# EAGLE board conduct-555-REVA (EAGLE 6.5.0)
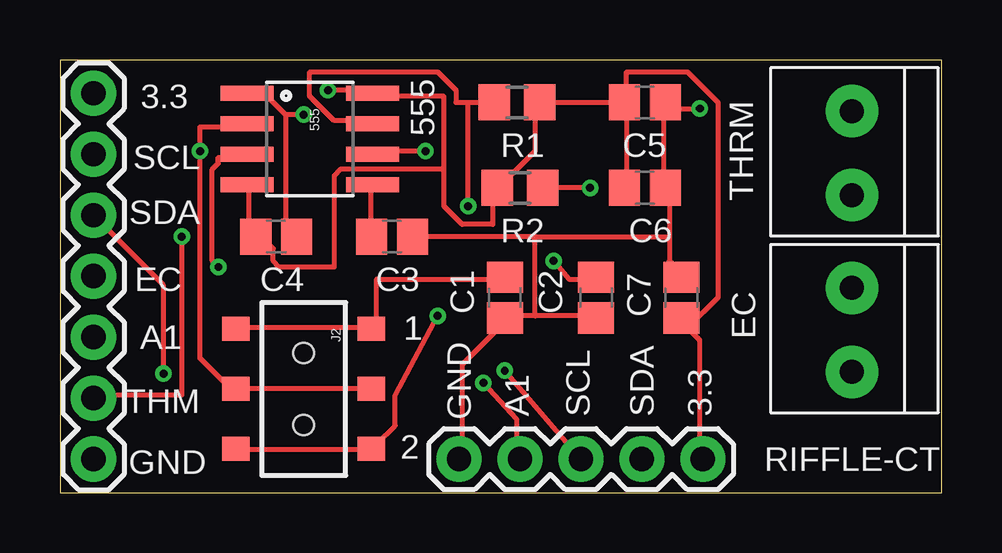
[diagram p0: board, top side]
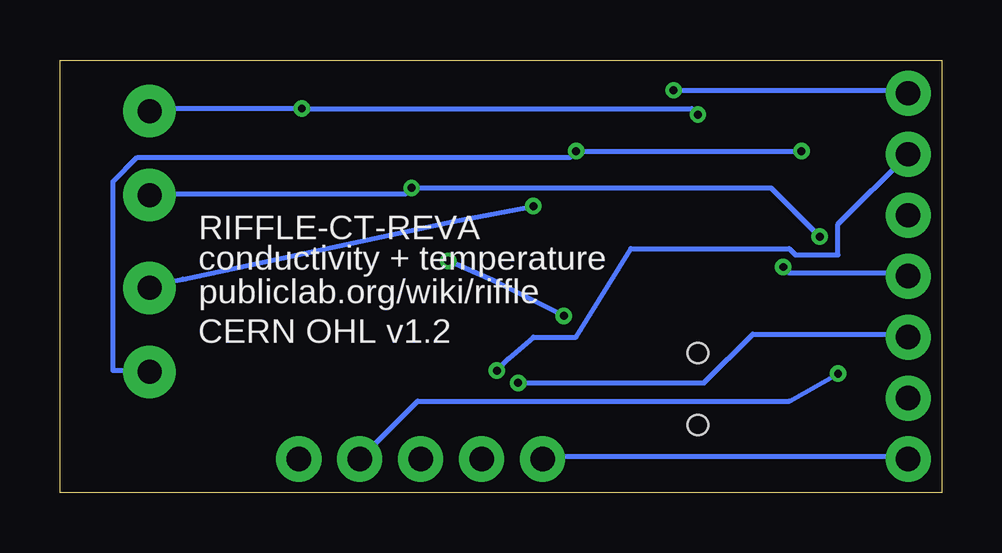
[diagram p1: board, bottom side, seen from below]

Size 36.75 x 18.02 mm. Coordinates in mm from the lower left corner, seen from the top.
Outline: 0,0 36.75,0 36.75,18.02 0,18.02 0,0
Copper layers (1*16): Top 0.0356mm / dielectric 1.5011mm / Bottom 0.0356mm
Design rules "LaenPCBOrder": minimum track width 6mil, minimum drill 13mil, track to track 6mil, track to pad 6mil, pad to pad 6mil, via to via 6mil, smd to smd 6mil, copper to edge 15mil, drill to drill 6mil, minimum pad ring 7mil, minimum via ring 7mil, stop-mask expansion 3mil, vias tented up to drill 0mil, thermal gap 10mil
Net classes: 0 default: width 0.203 mm, drill 0.33 mm, clearance 0.203 mm

## Footprints (pad centres in the part's own frame; a part is rotated, then mirrored left to right if it is on the bottom)
SO08@1 = smd 0.61 x 2.21: 1 -1.905,-2.616; 2 -0.635,-2.616; 3 0.635,-2.616; 4 1.905,-2.616; 5 1.905,2.616; 6 0.635,2.616; 7 -0.635,2.616; 8 -1.905,2.616
C0805 = smd 1.3 x 1.5: 1 -0.85,0; 2 0.85,0
1X2-3.5MM = drill 1 pad 2.184: 1 1.8,0; 2 -1.7,0
AYZ0202 = smd 1 x 1.15: 1 -2.5,2.825; 2 0,2.825; 3 2.5,2.825; 4 -2.5,-2.825; 5 0,-2.825; 6 2.5,-2.825 | hole 0.85: 1.5,0; -1.5,0
1X05 = drill 1.016 pad 1.88: 1 0,0; 2 2.54,0; 3 5.08,0; 4 7.62,0; 5 10.16,0
1X07 = drill 1.016 pad 1.88: 1 0,0; 2 2.54,0; 3 5.08,0; 4 7.62,0; 5 10.16,0; 6 12.7,0; 7 15.24,0
R0805 = smd 1.3 x 1.5: 1 -0.95,0; 2 0.95,0

## Placement (x,y rotation side)
555  NE555D  [SO08@1]  10.41,14.73 270 top
C1  1uF  [C0805]  18.54,8.13 270 top
C2  .1uF  [C0805]  22.35,8.13 270 top
C3  .01u  [C0805]  13.84,10.67 180 top
C4  100n  [C0805]  9.02,10.67 180 top
C5  100n  [C0805]  24.38,16.26 180 top
C6  .1uF  [C0805]  24.38,12.7 180 top
C7  1uF  [C0805]  25.91,8.13 270 top
EC  1X2-3.5MM  [1X2-3.5MM]  33.02,6.73 90 top
J2  AYZ0202  [AYZ0202]  10.16,4.32 270 top
JP2  [1X05]  16.64,1.4 0 top
JP4  [1X07]  1.4,1.4 90 top
R1  3.3K  [R0805]  19.05,16.26 180 top
R2  10k  [R0805]  19.18,12.7 180 top
THRM  1X2-3.5MM  [1X2-3.5MM]  33.02,14.1 90 top

## Library data of the parts
555 = SparkFun-AnalogIC
C1-C7 = resistor
EC THRM = adafruit
J2 = SparkFunNew
JP2 JP4 = SparkFun-Connectors
R1 R2 = rcl

## Nets
A1: JP2.2 JP4.3
EC: 555.3 JP4.4
GND: 555.1 C1.2 C2.2 C3.1 C4.1 C5.1 C6.1 C7.1 JP2.1 JP4.1 THRM.1
N1: 555.2 555.6 EC.2 J2.2 J2.5
N$2: 555.5 C3.2
N$3: 555.7 EC.1 R1.2
N$6: C2.1 J2.3 J2.6
SCL: JP2.3 JP4.6
SDA: JP2.4 JP4.5
THRM: JP4.2 R2.1 THRM.2
VCC: 555.4 555.8 C4.2 C5.2 C6.2 C7.2 JP2.5 JP4.7 R1.1 R2.2
VDD2: C1.1 J2.1 J2.4

## Tracks (layer width: path | path; a pad name or v marks a point on that pad's centre or on a via)
A1  (via drill 0.33)
  Top 0.203: v17.65,4.57 19.05,3.05 19.05,1.52 JP2.2
  Bottom 0.203: v17.65,4.57 9.91,4.57 7.87,6.6 1.52,6.6 JP4.3
EC  (via drill 0.33)
  Top 0.203: v6.6,9.4 6.35,9.65 6.35,13.46 6.6,13.72 6.6,13.97 7.62,13.97 555.3
  Bottom 0.203: v6.6,9.4 6.35,9.14 1.52,9.14 JP4.4
GND  (via drill 0.33)
  Top 0.203: 9.4,15.75 9.4,10.92 9.65,10.67 C4.1 | 9.4,15.75 8.64,16.51 7.87,16.51 555.1 7.87,16.76 | 25.15,16 25.15,16.26 C5.1 25.15,16 | 25.15,16 25.15,12.7 C6.1 25.4,12.7 25.4,10.67 | 25.4,10.67 25.4,9.65 25.91,9.14 C7.1 | 19.81,7.37 22.35,7.37 C2.2 | 19.81,7.37 18.54,7.37 C1.2 18.54,7.11 16.76,5.33 16.76,1.52 JP2.1 | 19.81,10.67 C3.1 | 19.81,7.37 19.81,10.67 | 19.81,10.67 25.4,10.67 | 25.15,16 v26.67,16 | v10.16,15.75 9.4,15.75
  Bottom 0.203: JP4.1 1.52,1.52 16.51,1.52 JP2.1 | THRM.1 33.02,16 v26.67,16 10.41,16 v10.16,15.75
N1  (via drill 0.33)
  Top 0.203: J2.2 J2.5 7.11,4.32 5.84,5.59 v5.84,14.22 5.84,15.24 7.62,15.24 555.2 | v15.24,14.22 13.21,14.22 555.6
  Bottom 0.203: EC.2 33.02,5.08 34.54,5.08 34.54,12.95 33.53,13.97 15.49,13.97 v15.24,14.22 v5.84,14.22
N$2
  Top 0.203: C3.2 12.95,10.67 12.95,12.7 555.5
N$3  (via drill 0.33)
  Top 0.203: 17.02,16.26 16.51,16.26 16.51,16.76 15.75,17.53 10.41,17.53 10.41,16.51 11.43,15.49 12.95,15.49 555.7 | 17.02,16.26 R1.2 | v17.02,11.94 17.02,16.26
  Bottom 0.203: v17.02,11.94 20.32,11.3 31.62,8.89 33.02,8.64 EC.1
N$6  (via drill 0.33)
  Top 0.203: J2.6 7.37,1.78 12.95,1.78 J2.3 13.21,2.03 13.97,2.79 13.97,4.06 v15.75,7.37 | v20.57,9.65 21.21,8.89 22.35,8.89 C2.1
  Bottom 0.203: v20.57,9.65 18.54,8.76 v15.75,7.37
SCL  (via drill 0.33)
  Top 0.203: JP2.3 v18.54,5.08
  Bottom 0.203: JP4.6 4.32,11.18 4.32,9.91 6.1,9.91 6.35,10.16 12.95,10.16 15.24,6.48 17.02,6.48 18.03,5.59 v18.54,5.08
SDA  (via drill 0.33)
  Top 0.203: JP4.5 4.32,8.64 v4.32,4.95
  Bottom 0.203: v4.32,4.95 6.35,3.81 21.84,3.81 JP2.4
THRM  (via drill 0.33)
  Top 0.203: v22.1,12.7 R2.1 | v5.08,10.67 5.08,4.06 1.52,4.06 JP4.2
  Bottom 0.203: THRM.2 33.02,12.45 22.35,12.45 v22.1,12.7 7.11,12.7 v5.08,10.67
VCC  (via drill 0.33)
  Top 0.203: 26.16,6.86 26.67,6.35 26.67,1.52 JP2.5 | 26.16,6.86 25.91,7.11 C7.2 26.16,6.86 | 555.4 7.87,12.7 7.87,10.92 8.13,10.67 C4.2 8.38,10.67 8.89,10.16 8.89,9.65 9.14,9.4 11.43,9.4 11.43,13.21 11.68,13.46 16,13.46 | 23.62,16.26 23.62,12.7 C6.2 | 16,13.46 16,11.94 16.76,11.18 18.03,11.18 18.03,12.7 R2.2 18.29,12.7 19.81,14.22 19.81,16.26 R1.1 C5.2 23.62,16.26 | 16,13.46 16,16.51 13.21,16.51 555.8 12.95,16.76 v11.18,16.76 | 26.16,6.86 27.43,8.13 27.43,16.26 26.16,17.53 23.62,17.53 23.62,16.26
  Bottom 0.203: v11.18,16.76 1.52,16.76 JP4.7
VDD2
  Top 0.203: J2.4 7.37,6.86 12.95,6.86 J2.1 13.21,6.86 13.21,8.89 18.54,8.89 C1.1

## Text on the board
tPlace: 3.3 | 555 | SCL | SDA | EC | A1 | 1 | THM | GND | A1 | SCL | SDA | 3.3 | GND | 2 | RIFFLE-CT
bPlace: RIFFLE-CT-REVA | conductivity + temperature | publiclab.org/wiki/riffle | CERN OHL v1.2